# Allegro board mainBoard.brd
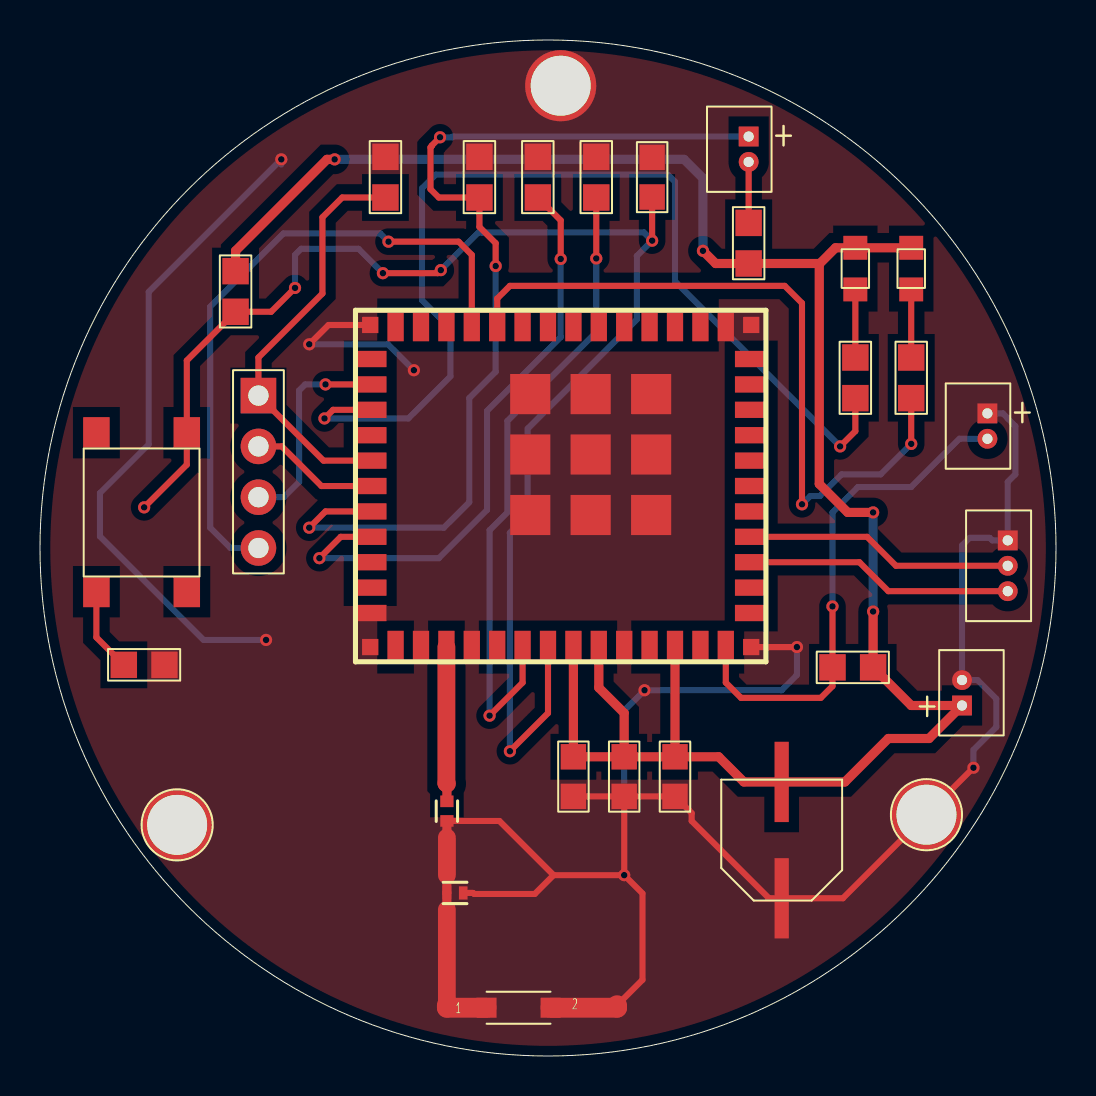
[diagram p0: board, top side]
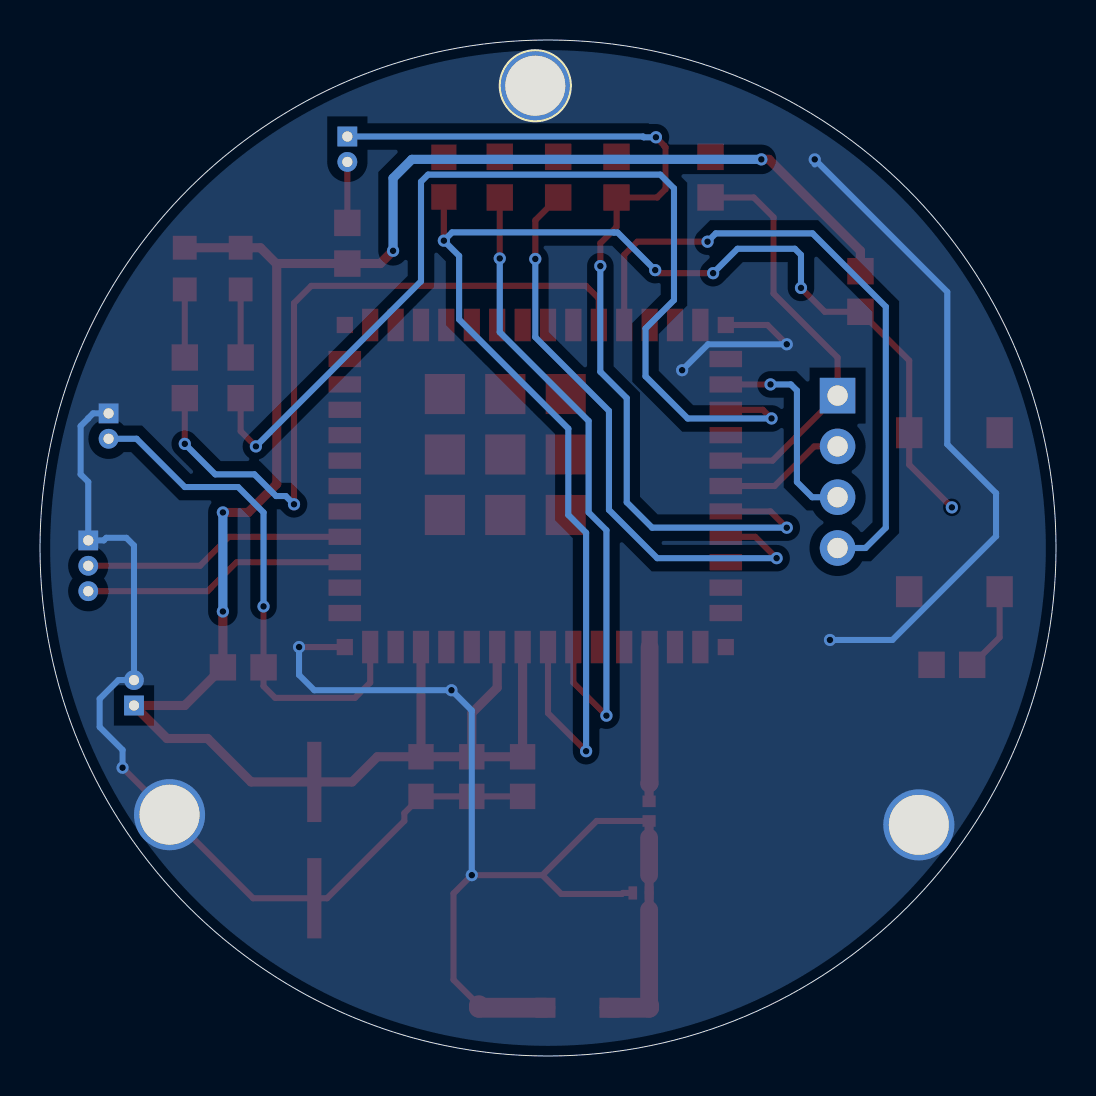
[diagram p1: board, bottom side, seen from below]

Outline 50.8 x 50.8 mm; copper layers: TOP, BOTTOM. Coordinates in mm from the lower left corner of the outline.
Outline path: circle c25.4,25.4 r25.4

## Placement (name value [footprint] x y rotation side)
C1  220uF/16V  [CAPPOL220U16V]  37.08 10.79 0 top
C2  0.1uF  [SMC0805]  29.21 13.97 270 top
C3  0.1uF  [SMC0805]  31.75 13.97 270 top
C4  1pF  [INDC_0402CS]  20.75 8.15 0 top
C5  0.1uF  [SMC0805]  30.61 43.94 90 top
C6  0.1uF  [SMC0805]  26.67 13.97 270 top
D1  -  [LED]  43.56 39.37 270 top
D2  -  [LED]  40.77 39.37 270 top
J1  HEADER 2  [HEADER21P25MM]  47.37 31.5 0 top
J2  HEADER 3  [HEADER31P25MM]  48.39 24.51 0 top
J3  HEADER 4  [HEADER42P54MM]  10.92 29.21 0 top
J4  HEADER 2  [HEADER21P25MM]  35.43 45.34 0 top
J5  HEADER 2  [HEADER21P25MM]  46.1 18.16 180 top
J6  HEADER 1  [HOLD]  44.32 12.06 0 top
J7  HEADER 1  [HOLD]  6.86 11.56 0 top
J8  HEADER 1  [HOLD]  26.04 48.51 180 bottom
L1  3.6nH  [CC0402]  20.35 12.24 270 top
R1  75  [SMR0805]  43.56 33.91 90 top
R2  75  [SMR0805]  40.77 33.91 90 top
R3  4.7K  [SMR0805]  9.78 38.23 270 top
R4  100R  [SMR0805]  5.21 19.56 0 top
R5  4.7K  [SMR0805]  35.43 40.64 90 top
R6  4.7K  [SMR0805]  40.64 19.43 180 top
R7  100K  [SMR0805]  17.27 43.94 90 top
R8  2.7K  [SMR0805]  21.97 43.94 90 top
R9  100K  [SMR0805]  24.89 43.94 90 top
R10  100K  [SMR0805]  27.81 43.94 90 top
S1  SW PUSHBUTTON  [BUTTON]  5.08 27.18 270 top
U1  -  [CC3200MOD]  35.56 20.45 0 top
U2  2.45-GHz Ant  [ANT_AH316M]  23.93 2.41 0 top

## Library data of the parts
C1 = CAPACITOR POL
C2-C6 = CAP NP
D1 D2 = LED_0
J1 J4 J5 = HEADER 2
J2 = HEADER 3
J3 = HEADER 4
J6-J8 = HEADER 1
L1 = INDUCTOR
R1-R4 R7-R10 = RESISTOR_0
R5 R6 = R
S1 = SW PUSHBUTTON
U1 = CC3200MOD_0
U2 = 2_0.45-GHz Ant

## Footprints (pads in the part's own frame, mm; a bottom-side part is the same pattern mirrored in y, then rotated)
ANT_AH316M
  rect 1.001x1.001 smd: 1(-1.6,0) 2(1.6,0)
BUTTON
  rect 1.549x1.321 smd: (-3.988,-2.261) (3.962,2.261) 1(-3.988,2.261) 2(3.962,-2.261)
CAPPOL220U16V
  rect 0.711x4.013 smd: 1(0,2.908) 2(0,-2.908)
CC0402
  rect 0.579x0.66 smd: 1(-0.49,0) 2(0.49,0)
CC3200MOD
  rect 0.813x0.813 smd: 1(0,16.104) 16(-19.05,16.104) 28(-19.05,0) 43(0,0)
  rect 0.813x1.626 smd: 2(-1.27,16.104) 3(-2.54,16.104) 4(-3.81,16.104) 5(-5.08,16.104) 6(-6.35,16.104) 7(-7.62,16.104) 8(-8.89,16.104) 9(-10.16,16.104) 10(-11.43,16.104) 11(-12.7,16.104) 12(-13.97,16.104) 13(-15.24,16.104) 14(-16.51,16.104) 15(-17.78,16.104) 29(-17.78,0) 30(-16.51,0) 31(-15.24,0) 32(-13.97,0) 33(-12.7,0) 34(-11.43,0) 35(-10.16,0) 36(-8.89,0) 37(-7.62,0) 38(-6.35,0) 39(-5.08,0) 40(-3.81,0) 41(-2.54,0) 42(-1.27,0)
  rect 1.626x0.813 smd: 17(-19.05,14.402) 18(-19.05,13.132) 19(-19.05,11.862) 20(-19.05,10.592) 21(-19.05,9.322) 22(-19.05,8.052) 23(-19.05,6.782) 24(-19.05,5.512) 25(-19.05,4.242) 26(-19.05,2.972) 27(-19.05,1.702) 44(0,1.702) 45(0,2.972) 46(0,4.242) 47(0,5.512) 48(0,6.782) 49(0,8.052) 50(0,9.322) 51(0,10.592) 52(0,11.862) 53(0,13.132) 54(0,14.402)
  rect 2.007x2.007 smd: 55(-5.004,12.649) 56(-8.026,12.649) 57(-11.049,12.649) 58(-5.004,9.627) 59(-8.026,9.627) 60(-11.049,9.627) 61(-5.004,6.604) 62(-8.026,6.604) 63(-11.049,6.604)
HEADER21P25MM
  rect 0.991x0.991 hole 0.508: 1(0,0.635)
  round 0.991 hole 0.508: 2(0,-0.635)
HEADER31P25MM
  rect 0.991x0.991 hole 0.508: 1(0,1.27)
  round 0.991 hole 0.508: 2(0,0) 3(0,-1.27)
HEADER42P54MM
  rect 1.778x1.778 hole 1.016: 1(0,3.81)
  round 1.778 hole 1.016: 2(0,1.27) 3(0,-1.27) 4(0,-3.81)
HOLD
  round 3.556 hole 2.997: 1(0,0)
INDC_0402CS
  rect 0.432x0.66 smd: 1(-0.409,0) 2(0.409,0)
LED
  rect 1.194x1.194 smd: 1(-1.041,0) 2(1.041,0)
SMC0805
  rect 1.27x1.27 smd: 1(-0.991,0) 2(0.991,0)
SMR0805
  rect 1.321x1.321 smd: 1(-1.016,0) 2(1.016,0)

## Nets
GND: C1.2 C2.2 C3.2 C4.1 C4.2 C5.2 C6.2 J1.1 J2.1 J5.2 J6.1 J7.1 J8.1 L1.2 R4.2 R7.2 R8.2 R9.2 R10.2 U1.1(GND2) U1.2(GND1) U1.16(GND18) U1.27(GND4) U1.28(GND7) U1.30(GND3) U1.32(GND8) U1.38(GND6) U1.43(GND5) U1.55(GND17) U1.56(GND16) U1.57(GND15) U1.58(GND14) U1.59(GND13) U1.60(GND12) U1.61(GND11) U1.62(GND10) U1.63(GND9) U2.1(IN) U2.2(GND)
VCC_3.3V: C1.1 C2.1 C3.1 C6.1 D1.1 D2.1 J5.1 R3.1 R5.1 R6.1 U1.36(VBAT_DCDC_ANA) U1.37(VBAT_DCDC_PA) U1.40(VBAT_DCDC_DIG_IO)
NLINK: R1.1 U1.11(GPIO22)
NREADY: R2.1 U1.19(GPIO28)
NRESET: C5.1 R3.2 S1.1 U1.35(NRESET)
SOP2: J4.1 R8.1 U1.23(TCXO_EN/SOP2)
SWITCH: J1.2 R6.2 U1.42(GPIO30)
UART0_RX: J2.2 U1.47(GPIO2)
UART0_TX: J2.3 U1.46(GPIO1)
N01152: R4.1 S1.2
N10829: J3.1 R7.1 U1.21(JTAG_TCK)
N10833: J3.2 U1.22(JTAG_TMS)
N10837: J3.3 U1.18(JTAG_TDO)
N10841: J3.4 U1.12(JTAG_TDI)
N12921: L1.1 U1.31(RF_BG)
N18108: R10.1 U1.34(SOP0)
N18112: R9.1 U1.24(SOP1)
N33058: J4.2 R5.2
N545706: D1.2 R1.2
N545710: D2.2 R2.2

Pads without a net: U1 3 4 5 6 7 8 9 10 13 14 15 17 20 25 26 29 33 39 41 44 45 48 49 50 51 52 53 54

## Via types
v1: diameter 0.61, hole 0.33, TOP to BOTTOM, 32 vias

## Routing (per net, layer and track width the routed paths; a pad name or vN(x,y) marks a point on that pad's centre or on a via; arc(x,y) is an arc through that point)
GND: length 154.3
  TOP w0.305: C4.2 21.66,8.15 21.71,8.1 24.74,8.1 25.68,9.04 ; C2.2 v1(29.21,9.04) ; C2.2 C6.2 ; C2.2 C3.2 32.58,12.15 32.58,11.75 36.45,7.89 C1.2 40.14,7.89 J6.1 v1(46.67,14.41) ; v1(29.21,9.04) 25.68,9.04 ; v1(29.21,9.04) 30.12,8.13 30.12,3.81 28.85,2.54 ; 25.68,9.04 22.97,11.75 L1.2 ; v1(13.46,35.59) 14.43,36.55 U1.16 ; v1(37.85,20.45) U1.43 ; 24.89,47.37 J8.1
  TOP w0.457: 20.35,9.04 20.34,9.04 C4.1 20.34,7.32 ; L1.2 20.35,10.92
  TOP w0.889: 20.34,2.54 20.34,7.32 ; 20.35,10.92 20.35,9.04
  TOP w0.991: 20.34,2.54 20.34,2.41 U2.1 ; 28.85,2.54 28.85,2.41 U2.2
  BOTTOM w0.305: 12.06,44.58 v1(12.06,44.83) 5.44,38.2 5.44,30.58 3,28.14 3,25.98 8.18,20.8 v1(11.3,20.8) ; v1(13.46,35.59) 17.4,35.59 v1(18.69,34.29) ; v1(46.67,14.41) 46.67,15.3 47.82,16.45 47.82,17.86 46.88,18.8 J5.2 46.1,25.53 46.48,25.91 47.49,25.91 47.61,25.78 J2.1 48.39,28.7 48.77,29.08 48.77,31.5 48.39,31.88 48.39,31.89 48.15,32.13 J1.1 ; v1(37.85,20.45) 37.85,19.05 37.08,18.29 v1(30.23,18.29) 29.21,17.27 v1(29.21,9.04)
VCC_3.3V: length 107.1
  TOP w0.457: v1(14.73,44.83) 14.35,44.83 9.78,40.26 R3.1 ; U1.36 C6.1 C2.1 ; C2.1 29.21,17.14 27.94,18.41 U1.37 ; C2.1 C3.1 ; 38.96,39.6 39.78,40.41 D2.1 D1.1 ; 38.96,39.6 38.96,28.6 40.39,27.18 v1(41.66,27.18) ; 38.96,39.6 38.94,39.62 R5.1 33.78,39.62 v1(33.15,40.26) ; U1.40 C3.1 ; C3.1 33.93,14.96 35.19,13.7 C1.1 40.25,13.7 42.42,15.87 44.45,15.87 J5.1 43.56,17.53 R6.1 v1(41.66,22.22)
  BOTTOM w0.457: v1(14.73,44.83) 32.21,44.83 33.15,43.89 v1(33.15,40.26) ; v1(41.66,22.22) v1(41.66,27.18)
NLINK: length 36.2
  TOP w0.305: v1(38.1,27.58) 38.1,37.64 37.24,38.51 23.49,38.51 22.86,37.87 U1.11 ; v1(43.56,30.61) R1.1
  BOTTOM w0.305: v1(43.56,30.61) 42.04,29.08 40.08,29.08 39,28 38.51,28 v1(38.1,27.58)
NREADY: length 52.1
  TOP w0.305: U1.19 14.66,32.31 v1(14.22,31.88) ; R2.1 40.77,31.24 v1(40,30.48)
  BOTTOM w0.305: v1(14.22,31.88) 18.41,31.88 20.52,33.99 20.52,36.37 19.1,37.8 19.1,43.38 19.79,44.07 31.39,44.07 31.75,43.71 31.75,38.73 v1(40,30.48)
NRESET: length 72.9
  TOP w0.305: v1(5.21,27.43) 7.34,29.57 S1.1 7.34,34.77 R3.2 11.56,37.21 v1(12.75,38.4) ; U1.35 25.4,17.14 v1(23.49,15.24) ; v1(20.04,39.29) 19.89,39.14 v1(17.14,39.14) ; v1(30.61,40.77) C5.1
  BOTTOM w0.305: v1(17.14,39.14) 15.93,40.36 13.06,40.36 12.75,40.06 v1(12.75,38.4) ; v1(20.04,39.29) 21.92,41.17 22.1,41.17 22.11,41.18 30.19,41.18 v1(30.61,40.77) 29.84,40 29.84,36.83 24.38,31.37 24.38,27.05 23.49,26.16 v1(23.49,15.24)
SOP2: length 48.9
  TOP w0.305: U1.23 14.27,27.23 v1(13.46,26.42) ; v1(20,45.94) 19.59,45.52 19.59,45.5 19.52,45.43 19.52,43.34 19.94,42.93 R8.1 21.97,41.45 22.78,40.64 v1(22.78,39.5)
  BOTTOM w0.305: v1(13.46,26.42) 20.19,26.42 21.46,27.69 21.46,32.89 22.78,34.21 v1(22.78,39.5) ; J4.1 20.65,45.97 20.61,45.94 v1(20,45.94)
SWITCH: length 25.6
  TOP w0.305: U1.42 34.29,18.67 35.05,17.91 39.04,17.91 39.62,18.49 R6.2 v1(39.62,22.48)
  BOTTOM w0.305: J1.2 45.97,30.86 43.56,28.45 40.89,28.45 39.62,27.18 v1(39.62,22.48)
UART0_RX: length 13.4
  TOP w0.305: J2.2 42.8,24.51 41.35,25.96 U1.47
UART0_TX: length 13.4
  TOP w0.305: U1.46 40.97,24.69 42.42,23.24 J2.3
N01152: length 4.2
  TOP w0.305: S1.2 2.82,20.93 4.19,19.56
N10829: length 20.7
  TOP w0.305: R7.1 15.11,42.93 14.12,41.94 14.12,38.13 10.92,34.92 J3.1 14.17,29.77 U1.21
N10833: length 6.4
  TOP w0.305: J3.2 12.09,30.48 14.07,28.5 U1.22
N10837: length 10.6
  TOP w0.305: U1.18 v1(14.27,33.58)
  BOTTOM w0.305: J3.3 12.19,27.94 12.95,28.7 12.95,33.27 13.26,33.58 v1(14.27,33.58)
N10841: length 32.4
  TOP w0.305: v1(17.42,40.72) 20.93,40.72 21.59,40.06 U1.12
  BOTTOM w0.305: J3.4 9.52,25.4 8.51,26.42 8.51,37.46 12.17,41.13 17.01,41.13 v1(17.42,40.72)
N12921: length 7.7
  TOP w0.457: 20.35,13.61 L1.1
  TOP w0.889: 20.35,13.61 20.32,13.64 U1.31
N18108: length 32.2
  TOP w0.305: U1.34 24.13,18.67 v1(22.48,17.02) ; v1(27.81,39.88) R10.1
  BOTTOM w0.305: v1(27.81,39.88) 27.81,36.2 23.37,31.75 23.37,27.18 22.48,26.29 v1(22.48,17.02)
N18112: length 30
  TOP w0.305: R9.1 26.04,41.78 v1(26.04,39.85) ; U1.24 15.04,25.96 v1(13.97,24.89)
  BOTTOM w0.305: v1(13.97,24.89) 19.94,24.89 22.35,27.3 22.35,32.26 26.04,35.94 v1(26.04,39.85)
N33058: length 3
  TOP w0.305: R5.2 J4.2
N545706: length 3.4
  TOP w0.305: R1.2 D1.2
N545710: length 3.4
  TOP w0.305: R2.2 D2.2

## Copper pours and planes (outline as drawn; the poured copper is in the pictures)
GND on TOP: 0.51,25.4 50.29,25.4 ; 4 cut-outs
GND on BOTTOM: 0.51,25.4 50.29,25.4 ; 3 cut-outs
